# Altium PCB Copy of powersuppy.PcbDoc
Units mm, origin at the board's own origin, x right, y up, seen from the top; angles counter-clockwise.
Board outline 153.8 x 127.13 mm, 2 copper layers (Top Layer, Bottom Layer); 118 components, 95 nets, 382 pads, 107 vias.
Unrouted connection lines stored in the file: 211.
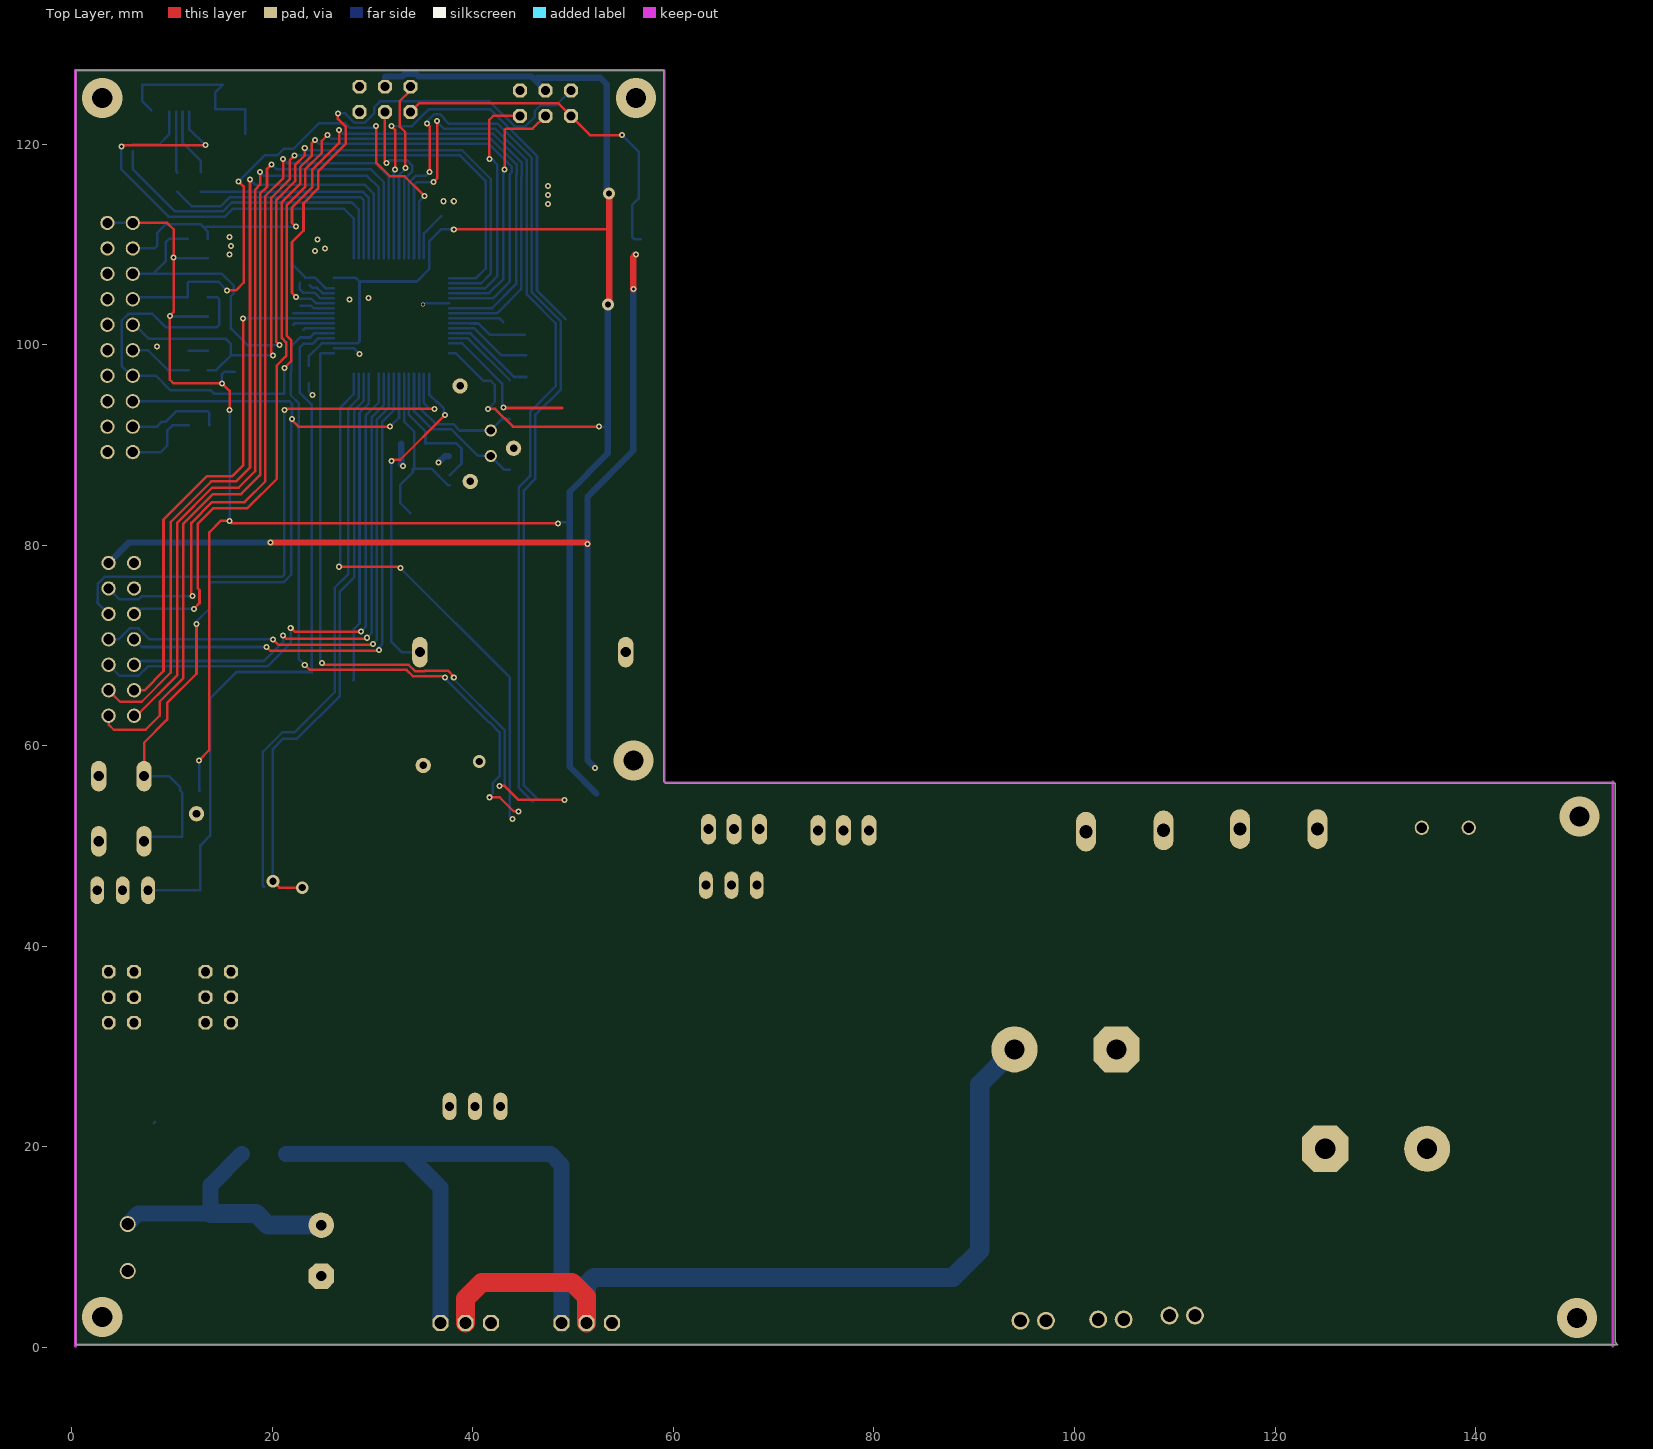
[diagram p0: Top Layer view]
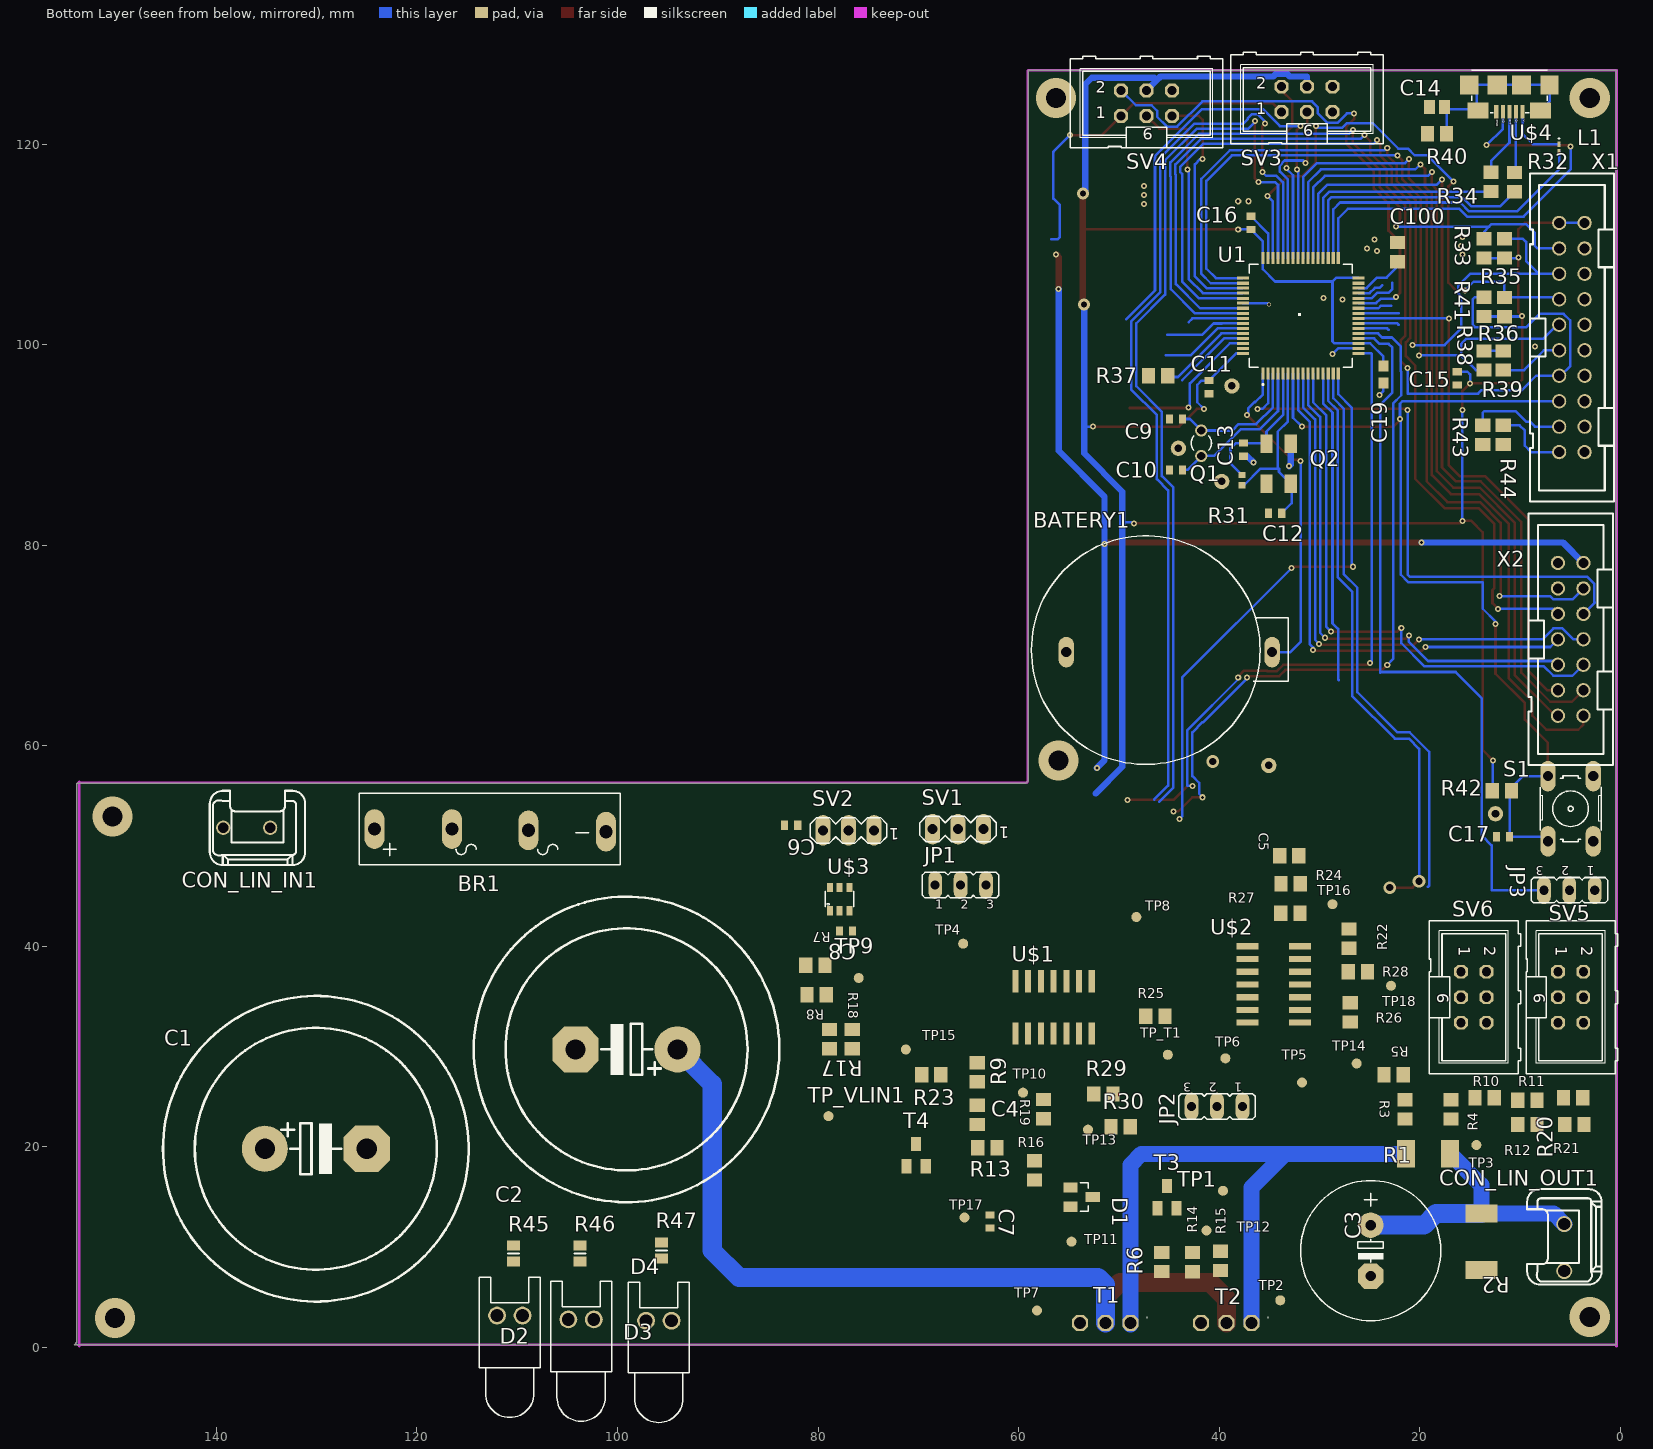
[diagram p1: Bottom Layer view, seen from below]

## Layer stack, top to bottom
Top Solder: solder mask 0.0102, Solder Resist, Dk 3.5
Top Layer: signal copper 0.0356
Dielectric 1: dielectric 0.32, FR-4, Dk 4.8
Bottom Layer: signal copper 0.0356
Bottom Solder: solder mask 0.0102, Solder Resist, Dk 3.5

## Board outline
0.381,127.382 0.411,127.352 59.056,127.352 59.056,56.475 59.27,56.261 153.924,56.261 153.924,0.508 154.178,0.254 0.381,0.254

## Design rules (kind name [scope] priority, off if disabled: settings)
Clearance [All] p1: gap=0.152 ignorepadtopadclearanceinfootprint=FALSE
ComponentClearance [All] p1 off: gap=0.254 collisioncheckmode=3 verticalgap=0.254 showdistances=FALSE
PolygonConnect [All] p1: connectstyle=Relief reliefconductorwidth=0.254 reliefentries=4 polygonreliefangle="90 Angle" airgapwidth=0.254
RoutingVias [All] p1: holewidth=0.3 width=0.6 viastyle="Through Hole" minholewidth=0.3 minwidth=0.6 maxholewidth=0.711 maxwidth=1.27
SolderMaskExpansion [All] p1: expansion=0.102
Width [All] p1: maxlimit=2.54 minlimit=0.254 preferedwidth=0.254
29 further rules are at their usual default settings.

## Classes and differential pairs
component class powersupply_grid8_0: BR1 C1 C2 C3 C4 C5 C6 C7 C8 CON_LIN_IN1 CON_LIN_OUT1 D1 D4 JP1 JP2 JP3 R1 R2 R3 R4 R5 R6 R7 R8 R9 R10 R11 R12 R13 R14 R15 R16 R17 R18 R19 R20 R21 R22 R23 R24 R25 R26 R27 R28 R29 R30 R47 SV1 SV2 T1 T2 T3 T4 TP1 TP2 TP3 TP4 TP5 TP6 TP7 TP8 TP9 TP10 TP11 TP12 TP13 TP14 TP15 TP16 TP17 TP18 TP_T1 TP_VLIN1 U$1 U$2 U$3
component class powersupply_grid8_1: BATERY1 C9 C10 C11 C12 C13 C14 C15 C16 C17 C19 C23 C100 D2 D3 L1 Q1 Q2 R31 R32 R33 R34 R35 R36 R37 R38 R39 R40 R41 R42 R43 R44 R45 R46 S1 SV3 SV4 SV5 SV6 U1 U$4 U$5 U$6 X1 X2

## Components (designator, comment, footprint, x,y, rotation, side; value= is the part's Value field where it differs from the comment)
BATERY1 "101" KEYSTONE101 55.245,69.342 r270 bottom
BR1 "4GBJ406" FB100 110.236,51.689 r180 bottom
C1 "15000u" EB30D 130.087,19.812 r180 bottom
C2 "15000u" EB30D 99.098,29.718 r0 bottom
C3 "470U" E5-13 24.892,9.652 r270 bottom
C4 "10n" C0805#1 64.135,23.173 r90 bottom
C5 "10n" C0805#1 33.02,49.022 r180 bottom
C6 "100n" C0402 82.677,52.07 r0 bottom
C7 "100n" C0402 62.865,12.573 r270 bottom
C8 "100n" C0402 77.216,41.529 r0 bottom
C9 "10p" C0402 44.323,92.583 r180 bottom
C10 "10p" C0402 44.323,87.503 r180 bottom
C11 "100n" C0402 41.021,95.758 r270 bottom
C12 "20p" C0402 34.417,83.185 r0 bottom
C13 "20p" C0402 37.592,89.535 r270 bottom
C14 "4.7n" C0805#2 18.288,123.698 r0 bottom
C15 "100n" C0402 16.256,96.647 r270 bottom
C16 "100n" C0402 36.83,112.141 r90 bottom
C17 "100n" C0402 11.684,50.927 r0 bottom
C19 "100n" C0603 23.622,97.028 r270 bottom
C100 "4.7u" C0805#1 22.225,109.22 r90 bottom
CON_LIN_IN1 "POWERCON" MKS1852-6-0-202#1 135.89,51.816 r0 bottom
CON_LIN_OUT1 "POWERCON" MKS1852-6-0-202#2 5.588,11.049 r270 bottom
D1 "BA70-06" SOT23 53.721,14.986 r270 bottom
D2 "LED0" LED-0 110.744,3.175 r180 bottom
D3 "LED0" LED-0 103.632,2.794 r180 bottom
D4 "LED0" LED-0 95.885,2.667 r180 bottom
JP1 "JP2E" JP2 65.786,46.101 r180 bottom
JP2 "JP2E" JP2 40.222,24.036 r0 bottom
JP3 "JP2E" JP2 5.08,45.593 r0 bottom
L1 "WE-CBF_0603" 0603 6.096,119.634 r270 bottom
Q1 "32k" TC26V 41.783,90.17 r90 bottom
Q2 "ABM3B" ABM3B 32.258,85.217 r90 bottom
R1 "0.33" R2010 19.177,19.304 r180 bottom
R2 "4.7K" R2512 13.843,10.541 r90 bottom
R3 "100k" R0805 21.463,23.749 r270 bottom
R4 "100k" R0805 16.891,23.749 r270 bottom
R5 "330K" R0805 22.606,27.178 r0 bottom
R6 "10k" R0805 45.72,8.509 r90 bottom
R7 "20k" R0805 80.264,38.1 r0 bottom
R8 "20k" R0805 80.137,35.179 r0 bottom
R9 "1M" R0805 64.135,27.432 r90 bottom
R10 "330K" R0805 13.53,24.892 r180 bottom
R11 "20k" R0805 9.271,24.638 r180 bottom
R12 "20k" R0805 9.271,22.225 r180 bottom
R13 "100" R0805 63.119,19.904 r180 bottom
R14 "1k" R0805 42.672,8.509 r270 bottom
R15 "1.2k" R0805 39.878,8.636 r270 bottom
R16 "1k" R0805 58.42,17.653 r270 bottom
R17 "2.2k" R0805 78.867,30.734 r90 bottom
R18 "2.2k" R0805 76.588,30.734 r90 bottom
R19 "100" R0805 57.531,23.749 r90 bottom
R20 "2.2k" R0805 4.699,24.892 r0 bottom
R21 "2.2k" R0805 4.572,22.225 r0 bottom
R22 "1M" R0805 27.051,40.767 r90 bottom
R23 "100" R0805 68.707,27.178 r0 bottom
R24 "100" R0805 32.893,46.228 r180 bottom
R25 "10" R0805 46.361,33.02 r0 bottom
R26 "1k" R0805 26.924,33.401 r90 bottom
R27 "1k" R0805 32.893,43.307 r0 bottom
R28 "1k" R0805 26.162,37.465 r0 bottom
R29 "1k" R0805 51.562,25.273 r180 bottom
R30 "1k" R0805 49.842,22.004 r180 bottom
R31 "1M" R0402 37.719,86.487 r270 bottom
R32 "10" R0805 10.541,116.205 r270 bottom
R33 "10k" R0805 13.589,109.601 r270 bottom
R34 "10" R0805 12.89,116.23 r270 bottom
R35 "10k" R0805 11.557,109.601 r270 bottom
R36 "10k" R0805 11.557,103.759 r270 bottom
R37 "10k" R0805 46.101,96.901 r180 bottom
R38 "10k" R0805 13.589,98.425 r270 bottom
R39 "10k" R0805 11.684,98.425 r270 bottom
R40 "1M" R0805 18.288,121.031 r180 bottom
R41 "10k" R0805 13.589,103.759 r90 bottom
R42 "10k" R0805 11.811,55.499 r180 bottom
R43 "10k" R0805 13.716,90.993 r90 bottom
R44 "10k" R0805 11.684,90.993 r90 bottom
R45 "Res2" 6-0805_L 110.363,9.345 r270 bottom value=100
R46 "Res2" 6-0805_L 103.759,9.345 r270 bottom value=100
R47 "Res2" 6-0805_L 95.631,9.652 r270 bottom value=100
S1 "10-XX" B3F-10XX 4.953,53.721 r270 bottom
SV1 "MA03-1" MA03-1 66.04,51.689 r0 bottom
SV2 "MA03-1" MA03-1 76.962,51.562 r0 bottom
SV3 "ML6" ML6 31.242,124.46 r180 bottom
SV4 "ML6" ML6 47.244,124.079 r180 bottom
SV5 "ML6" ML6 4.953,34.925 r270 bottom
SV6 "ML6" ML6 14.605,34.925 r270 bottom
T1 "IRL640PBF" TO-220AB 53.848,2.413 r180 bottom
T2 "IRL640PBF" TO-220AB 41.783,2.413 r180 bottom
T3 "BC856" SOT23-BEC 45.212,14.986 r180 bottom
T4 "NPN BC847" SOT23-BEC 70.231,19.177 r180 bottom
TP1 "TPB2,54" B2,54 39.624,15.621 r90 bottom
TP2 "TPB2,54" B2,54 33.909,4.699 r90 bottom
TP3 "TPB2,54" B2,54 14.351,20.193 r90 bottom
TP4 "TPB2,54" B2,54 65.532,40.259 r90 bottom
TP5 "TPB2,54" B2,54 31.75,26.416 r90 bottom
TP6 "TPB2,54" B2,54 39.383,28.829 r270 bottom
TP7 "TPB2,54" B2,54 58.166,3.683 r90 bottom
TP8 "TPB2,54" B2,54 48.26,42.926 r90 bottom
TP9 "TPB2,54" B2,54 75.946,36.83 r90 bottom
TP10 "TPB2,54" B2,54 59.563,25.4 r90 bottom
TP11 "TPB2,54" B2,54 54.737,10.541 r90 bottom
TP12 "TPB2,54" B2,54 41.275,11.651 r90 bottom
TP13 "TPB2,54" B2,54 53.086,21.717 r90 bottom
TP14 "TPB2,54" B2,54 26.289,28.321 r90 bottom
TP15 "TPB2,54" B2,54 71.247,29.718 r90 bottom
TP16 "TPB2,54" B2,54 28.702,44.196 r90 bottom
TP17 "TPB2,54" B2,54 65.405,12.954 r90 bottom
TP18 "TPB2,54" B2,54 22.86,36.068 r90 bottom
TP_T1 "TPB2,54" B2,54 45.124,29.186 r270 bottom
TP_VLIN1 "TPB2,54" B2,54 78.968,23.064 r270 bottom
U1 "STM32F7X2RXT" LQFP64-10X10MM 31.877,102.87 r90 bottom
U$1 "LM324" SO14 56.515,33.909 r0 bottom
U$2 "LM324" SO14 34.544,36.195 r90 bottom
U$3 "MAX6070" SOT23-6 77.851,44.704 r180 bottom
U$4 "USB_MICROB" USB_MICROB_PACKAGE 11.049,122.555 r0 bottom
X1 "2520-" PAK100/2500-20 4.826,100.711 r270 bottom
X2 "2514-" PAK100/2500-14 4.953,70.612 r270 bottom

## Footprints (in the part's own frame and the unit in brackets; to place one, negate y for a bottom-side part, rotate by r counter-clockwise, add the part's x,y. Pads: shape width x height; smd on the part's side, far side on the other; paste and mask are expansions set on the pad)
6-0805_L [mm] "Chip Resistor, Body 2.0x1.2mm, IPC High Density"
  rect 1x1.3 smd: 1(-0.8,0) 2(0.8,0)
  silkscreen extent 0,-0.55 0,0.55, body extent -1.07,-0.7 1.07,0.7, height 0.7
0603 [mm] "Chip Inductor, Body 0.6x0.3mm, IPC High Density"
  rect 0.5x0.3 smd: 1(-0.35,0) 2(0.35,0)
  silkscreen extent -0.9,-0.05 -0.9,0.05, body extent -0.33,-0.18 0.33,0.18, height 0.55
ABM3B [mil]
  rect 71x48 smd: P$1(36,24) P$2(193,24) P$3(193,119) P$4(36,119)
B2,54 [mm]
  rrect100% 1x1 smd: TP(0,0)
B3F-10XX [mil]
  oval 120x60 hole 40: 1(-128,89) 2(128,89) 3(-128,-89) 4(128,-89)
  silkscreen extent -130,-120 130,120
C0402 [mil]
  rect 28x36 smd: 1(-25.59,0) 2(26,0)
C0603 [mil]
  rect 44x40 smd: 1(-33.46,0) 2(34,0)
C0805#1 [mil]
  rect 52x60 smd: 1(-37.4,0) 2(38,0)
C0805#2 [mil] "Chip Capacitor, Body 2.0x1.3mm, IPC High Density"
  rect 43.31x55.12 smd: 1(-29.53,0) 2(29.53,0)
  body extent -43,-29 43,29, height 55
E5-13 [mil]
  round 100 hole 40: +(-100,0)
  oct 100x100 hole 40: -(100,0)
  silkscreen extent -275,-275 275,275
EB30D [mil]
  round 181 hole 79: +(-200,0)
  oct 181x181 hole 79: -(200,0)
  silkscreen extent -600,-600 600,600
FB100 [mil]
  oval 78x156 hole 52: +(-551.18,0) -(358,-10) AC1(-247.18,0) AC2(53,-5)
  silkscreen extent -611,-140 414,140
JP2 [mil]
  oval 54x108 hole 36: 1(-100,0) 2(0,0) 3(100,0)
  silkscreen extent -150,-50 150,50
KEYSTONE101 [mil]
  oval 120x60 hole 40: P$1(0,0) P$2(0,808)
  silkscreen extent -457,-137 441,871
LED-0 [mil] "LED; 2 Leads"
  round 70 hole 50: 1(50,0) 2(-50,0)
  silkscreen extent -120,-400 120,150
LQFP64-10X10MM [mil]
  rect 47x12 smd: 1(-226.38,148) 2(-226.38,128) 3(-226.38,109) 4(-226.38,89) 5(-226.38,69) 6(-226.38,50) 7(-226.38,30) 8(-226.38,10) 9(-226.38,-9.84) 10(-226.38,-29.53) 11(-226.38,-49.21) 12(-226.38,-68.9) 13(-226.38,-88.58) 14(-226.38,-108.27) 15(-226.38,-127.95) 16(-226.38,-147.64) 33(227,-147.64) 34(227,-127.95) 35(227,-108.27) 36(227,-88.58) 37(227,-68.9) 38(227,-49.21) 39(227,-29.53) 40(227,-9.84) 41(227,10) 42(227,30) 43(227,50) 44(227,69) 45(227,89) 46(227,109) 47(227,128) 48(227,148)
  rect 12x47 smd: 17(-147.64,-226.38) 18(-127.95,-226.38) 19(-108.27,-226.38) 20(-88.58,-226.38) 21(-68.9,-226.38) 22(-49.21,-226.38) 23(-29.53,-226.38) 24(-9.84,-226.38) 25(10,-226.38) 26(30,-226.38) 27(50,-226.38) 28(69,-226.38) 29(89,-226.38) 30(109,-226.38) 31(128,-226.38) 32(148,-226.38) 49(148,227) 50(128,227) 51(109,227) 52(89,227) 53(69,227) 54(50,227) 55(30,227) 56(10,227) 57(-9.84,227) 58(-29.53,227) 59(-49.21,227) 60(-68.9,227) 61(-88.58,227) 62(-108.27,227) 63(-127.95,227) 64(-147.64,227)
  silkscreen extent -273,-202 202,202
MA03-1 [mil]
  oval 60x120 hole 40: 1(-100,0) 2(0,0) 3(100,0)
  silkscreen extent -150,-50 150,50
MKS1852-6-0-202#1 [mil]
  round 56 hole 40: 1(-49.21,0) 2(135,0)
  silkscreen extent -186,-145 188,146
MKS1852-6-0-202#2 [mil]
  round 62.99 hole 47.24: 1(-49.21,0) 2(135,0)
  silkscreen extent -186,-145 188,146
ML6 [mil]
  oct 54x54 hole 36: 1(-100,-50) 2(-100,50) 3(0,-50) 4(0,50) 5(100,-50) 6(100,50)
  silkscreen extent -300,-175 300,185
PAK100/2500-14 [mil]
  round 56 hole 40: 1(-300,-50) 2(-300,50) 3(-200,-50) 4(-200,50) 5(-100,-50) 6(-100,50) 7(0,-50) 8(0,50) 9(100,-50) 10(100,50) 11(200,-50) 12(200,50) 13(300,-50) 14(300,50)
  silkscreen extent -494,-165 494,166
PAK100/2500-20 [mil]
  round 56 hole 40: 1(-450,-50) 2(-450,50) 3(-350,-50) 4(-350,50) 5(-250,-50) 6(-250,50) 7(-150,-50) 8(-150,50) 9(-50,-50) 10(-50,50) 11(50,-50) 12(50,50) 13(150,-50) 14(150,50) 15(250,-50) 16(250,50) 17(350,-50) 18(350,50) 19(450,-50) 20(450,50)
  silkscreen extent -644,-165 644,166
R0402 [mil]
  rect 24x28 smd: 1(-19.69,0) 2(20,0)
R0805 [mil]
  rect 52x60 smd: 1(-37.4,0) 2(38,0)
R2010 [mil]
  rect 71x107 smd: 1(-86.61,0) 2(87,0)
R2512 [mil]
  rect 71x126 smd: 1(-110.24,0) 2(111,0)
SO14 [mil]
  rect 24x87 smd: 1(-150,-102.36) 2(-100,-102.36) 3(-50,-102.36) 4(0,-102.36) 5(50,-102.36) 6(100,-102.36) 7(150,-102.36) 8(150,103) 9(100,103) 10(50,103) 11(0,103) 12(-50,103) 13(-100,103) 14(-150,103)
SOT23 [mil]
  rect 40x56 smd: 1(-37.4,-43.31) 2(38,-43.31) 3(0,44)
  silkscreen extent -56,-6 56,26
SOT23-6 [mil]
  rect 24x36 smd: 1(-37.4,-45.28) 2(0,-45.28) 3(38,-45.28) 4(38,46) 5(0,46) 6(-37.4,46)
  silkscreen extent -56,-31 56,31
SOT23-BEC [mil]
  rect 40x56 smd: B(-37.4,-43.31) C(0,44) E(38,-43.31)
TC26V [mil]
  round 48 hole 32: 1(-50,0) 2(50,0)
  silkscreen extent -28,-40 29,40
TO-220AB [mm]
  oct 1.6x1.6 hole 1.2: P$1(-0.03,0.025) P$2(2.515,0.025) P$3(5.004,0.025)
  silkscreen extent 6.65,0.48 6.65,0.63
USB_MICROB_PACKAGE [mil]
  rect 16x54 smd: D+(0,-26.77) D-(-25.2,-26.77) GND(52,-26.77) ID(26,-26.77) V(-51.18,-26.77)
  rect 83x63 smd: PAD1(-122.05,-31.5) PAD2(123,-31.5)
  rect 71x75 smd: PAD3(-157.48,-131.89) PAD6(158,-131.89)
  rect 75x75 smd: PAD4(-47.24,-131.89) PAD5(48,-131.89)
  silkscreen extent -148,-189 148,-22

## Part data
C1 C2: library part CPOL-EUE10-30, "<B>POLARIZED CAPACITOR</B>, European symbol", +=+
C3: library part CPOL-EUE5-13, "<B>POLARIZED CAPACITOR</B>, European symbol", +=+
C4 C5 C14: library part C-EUC0805, "<B>CAPACITOR</B>, European symbol", SPICEPREFIX=C
C6 C7 C8 C9 C10 C11 C12 C13 C15 C16 C17: library part C-EUC0402, "<B>CAPACITOR</B>, European symbol", SPICEPREFIX=C
C19: library part C-EUC0603, "<B>CAPACITOR</B>, European symbol", SPICEPREFIX=C
C100: library part C-EUC0805, SPICEPREFIX=C
D1: library part BAS40-06
D2 D3 D4: "Typical INFRARED GaAs LED", LatestRevisionDate=08-Jul-2005, LatestRevisionNote="Mech Layer 1 removed.", PackageDescription="LED; 2 Leads", PackageReference=LED-0, Published=8-Jun-2000, Publisher="Altium Limited"
JP1 JP2 JP3: "<b>JUMPER</b>"
L1: "<b> SMD EMI Suppression Ferrite Beads WE-CBF</b> <p> /  / - Excellent anti-EMI properties <br> / - Low DC-restistance <br> / - Impedances till 3000 ohms <br> / - Rated current up to 6 A<p> /  / -- Reliable Ni-Sn electrodes<br> / -- Perfect as data lined filter and for uncoupling of distribution voltage<br>", MPN=742792695, PACKAGE=IND-0603, OC_FARNELL=1635699, OC_NEWARK=08P2449, SUPPLIER="Wuerth Elektronik"
Q1: library part CRYSTALTC26V, "<b>CRYSTAL</b>", 1=1, 2=2, OC_FARNELL=unknown, OC_NEWARK=unknown
R1: library part R-EU_R2010, "<B>RESISTOR</B>, European symbol"
R2: library part R-EU_R2512, "<B>RESISTOR</B>, European symbol"
R3 R4 R5 R6 R7 R8 R9 R10 R11 R12 R13 R14 R15 R16 R17 R18 R19 R20 R21 R22 R23 R24 R25 R26 R27 R28 R29 R30 R32 R33 R34 R35 R36 R37 R38 R39 R40 R41 R42 R43 R44: library part R-EU_R0805, "<B>RESISTOR</B>, European symbol"
R31: library part R-EU_R0402, "<B>RESISTOR</B>, European symbol"
R45 R46 R47: "Resistor", LatestRevisionDate=17-Jul-2002, LatestRevisionNote="Re-released for DXP Platform.", PackageDescription="Axial Device, Thru-Hole; 2 Leads; 0.4 in Pin Spacing", PackageReference=AXIAL-0.4, Published=8-Jun-2000, Publisher="Altium Limited"
S1: "<b>OMRON SWITCH</b>", MPN=B3F-1000, OC_FARNELL=176432, OC_NEWARK=36M3542
SV1 SV2: "<b>PIN HEADER</b>", OC_FARNELL=unknown, OC_NEWARK=unknown
SV3 SV4 SV5 SV6: "<b>HARTING</b>", OC_FARNELL=unknown, OC_NEWARK=unknown
T3: library part *-PNP-SOT23-BEC, "PNP Transistror"
T4: library part *-NPN-SOT23-BEC
TP1 TP2 TP3 TP4 TP5 TP6 TP7 TP8 TP9 TP10 TP11 TP12 TP13 TP14 TP15 TP16 TP17 TP18 TP_T1 TP_VLIN1: "<b>Test pad</b>"
U1: MANUFACTURER_PART_NUMBER=stm32f7x2rxt, VENDOR=STMicroelectronics
U$4: "This is the hirose ZX62-B-5PA(11) MICRO-USB B Type female connection.", USB=USB
X1 X2: "<b>3M (TM) Pak 100 4-Wall Header</b><p> / Source: 3M", OC_FARNELL=unknown, OC_NEWARK=unknown
U$1 U$2: V+=V+, V-=V-

## Free pads (board coordinates)
  round 1.524 hole 0.762: 2(35.052,58.039) 3(12.446,53.213) 4(38.735,95.885) 5(39.751,86.36) 6(44.069,89.662)

## Via types
v1: diameter 0.6, hole 0.3, Top Layer to Bottom Layer, 95 vias
v2: diameter 4, hole 2, Top Layer to Bottom Layer, 6 vias
v3: diameter 1.27, hole 0.711, Top Layer to Bottom Layer, 3 vias
v4: diameter 1.2, hole 0.6, Top Layer to Bottom Layer, 2 vias
v5: diameter 0.4, hole 0.3, Top Layer to Bottom Layer, 1 vias

## Nets (pads, with @x,y where several pads share a name; then routed paths per layer and width w, separated by ;. In a path a pad name is that pad's centre, name@x,y a point inside that pad or via, vN(x,y) a via of type N, cw(c..) or ccw(c..) an arc to the next point about the centre after c; other vN are vias at no path point)
+3V3: C11.1 C15.1 C16.1 C19.1 R33.2 R35.2 R36.2 R41.1 R42.1 SV3.4 SV4.4 SV5.1 SV6.1 U1.13 U1.19 U1.32 U1.48 U1.64 X1.1 X1.2 | length 309
  Top Layer w0.254: X1.1 9.525,112.141 10.16,111.506 v1(10.16,108.712) 10.16,103.251 v1(9.779,102.87) 9.779,96.52 10.16,96.139 v1(14.986,96.139) 15.748,95.377 v1(15.748,93.472) ; v1(12.7,58.547) 13.716,59.563 13.716,81.28 14.859,82.423 v1(15.748,82.423) 16.002,82.169 v1(48.514,82.169) ; v1(38.1,111.506) 53.594,111.506 ; v1(41.529,93.599) 42.217,93.599 43.995,91.821 v1(52.578,91.821)
  Top Layer w0.635: v4(53.467,104.013) 53.594,104.14 53.594,111.506 v4(53.594,115.062)
  Bottom Layer w0.254: X1.2 X1.1 ; v1(9.779,102.87) 9.84,102.809 R41.1 ; v1(10.16,108.712) 10.236,108.636 R35.2 R33.2 ; v1(12.7,58.547) 12.7,55.56 R42.1 ; v1(14.986,96.139) 14.986,97.028 15.255,97.297 C15.1 ; v1(15.748,82.423) v1(15.748,93.472) ; C19.1 23.622,98.806 24.936,100.12 U1.19 28.492,100.12 28.702,100.33 28.702,106.299 ; U1.32@26.127,106.655 28.346,106.655 28.702,106.299 ; 28.067,66.548 28.148,66.629 28.148,71.656 28.702,72.21 28.702,93.218 29.627,94.143 U1.13 ; U1.64 38.309,99.12 C11.1 41.768,96.408 42.186,95.99 42.186,94.256 v1(41.529,93.599) ; v1(38.1,111.506) 38.085,111.491 C16.1 35.636,110.297 U1.48 35.636,107.518 34.417,106.299 28.702,106.299 ; v1(48.514,82.169) 48.641,82.296 49.657,82.296 ; v1(52.578,91.821) 53.467,91.821
  Bottom Layer w0.635: SV3.4 31.242,126.746 32.961,126.746 33.202,126.987 34.362,126.987 34.603,126.746 45.847,126.746 46.228,126.365 ; SV4.4 46.228,126.365 ; 52.324,55.245 49.657,57.912 49.657,82.296 49.657,85.344 53.467,89.154 53.467,91.821 v4(53.467,104.013) ; v4(53.594,115.062) 53.34,115.316 53.34,125.959 52.692,126.606 46.469,126.606 46.228,126.365
+5V: C8.1 SV3.1 SV4.1 U$3.3 U$3.6 X2.2 | length 137.1
  Top Layer w0.254: SV3.1 34.671,124.079 48.514,124.079 SV4.1 51.689,120.904 v1(54.864,120.904)
  Top Layer w0.635: v1(19.812,80.264) 51.308,80.264 v1(51.435,80.137) ; v1(56.007,105.537) 56.007,108.712 v1(56.261,108.966) v1@56.134,108.966
  Bottom Layer w0.254: v1(54.864,120.904) 56.515,119.253 56.53,119.253 56.53,116.84 56.53,114.569 55.88,113.919 55.88,110.744 56.134,110.49 56.728,110.49
  Bottom Layer w0.635: X2.2 5.715,80.264 v1(19.812,80.264) ; v1(52.197,57.785) 51.435,58.547 v1(51.435,80.137) 51.435,84.836 56.007,89.408 v1(56.007,105.537)
AGND: C1.- C2.- C3.- C6.2 C7.2 C8.2 CON_LIN_OUT1.2 D4.2 R2.1 R5.2 R17.1 R18.1 R20.1 R21.1 R30.2 SV1.3 SV2.3 T3.C T4.E U1.12 U1.18 U$1.11 U$2.11 U$3.2 | length 2.8
  Bottom Layer w0.254: U1.18 28.142,99.62 v1(28.702,99.06)
DGND: BATERY1.P$1 C11.2 C12.2 C13.2 C14.2 C15.2 C16.2 C17.2 C19.2 C100.2 D2.2 D3.2 pad.2 pad.3 pad.4 pad.5 pad.6 Q2.P$2 Q2.P$4 R37.1 R38.1 R39.1 R40.1 R43.1 R44.1 S1.1 S1.2 SV3.5 SV3.6 SV4.6 SV5.5 SV6.5 U1.31 U1.47 U1.63 U$4.GND X1.4 X1.6 X1.8 X1.10 X1.12 X1.14 X1.16 X1.18 X1.20 X2.1 X2.3 | length 11.7
  Bottom Layer w0.254: R39.1 R38.1 ; C19.2 23.622,95.377 v1(24.003,94.996) ; U1.47 35.128,111.1 C16.2
  Bottom Layer w0.635: Q2.P$2 32.868,88.036 v1(33.02,87.884) ; v1(36.576,88.265) 37.186,88.875 C13.2
  other v1: 8.509,99.822 27.686,104.521 29.591,104.648 15.748,108.966 24.257,109.347 25.273,109.601 15.875,109.855 24.511,110.49 15.748,110.744 47.498,114.046 37.084,114.3 38.1,114.3 47.498,114.935 47.498,115.824
  other v2: 150.114,2.921 3.048,3.048 150.368,52.959 56.007,58.547 3.048,124.587 56.261,124.587
  other v3: 40.64,58.42
FEEDBACK_LIN: C4.2 R9.1 R11.1 R12.1 R20.2 R21.2 TP10.TP U$1.5 U$1.9
GND: BR1.- C9.1 C10.1
IDAC: JP3.3 U$1.12 | length 69.8
  Top Layer w0.254: v1(23.241,68.072) 23.749,67.564 33.403,67.564 34.038,66.929 37.119,66.929 v1(37.246,66.802) ; v1(41.656,54.864) 42.672,54.864 44.069,53.467 v1(44.577,53.467)
  Bottom Layer w0.254: v1(23.241,68.072) 22.652,68.661 22.652,94.144 21.844,94.952 21.844,97.289 21.89,97.335 21.89,99.822 22.779,100.711 23.749,100.711 24.158,101.12 26.127,101.12 ; v1(37.246,66.802) 37.246,66.693 41.582,62.357 41.656,62.357 42.672,61.341 42.672,56.97 41.991,56.289 41.991,55.199 v1(41.656,54.864)
IMEAS: U1.15 U$2.13 U$2.14 | length 55.9
  Bottom Layer w0.254: 19.177,45.934 19.05,46.061 19.05,59.392 20.999,61.341 22.216,61.341 26.23,65.355 26.23,75.76 27.559,77.089 27.559,93.599 28.627,94.667 U1.15
IPOT: JP3.1 SV2.2
JNTRST: R33.1 U1.56 X1.3 | length 71.7
  Top Layer w0.254: v1(22.352,111.76) 21.971,112.141 21.971,113.665 23.984,115.678 23.984,117.41 26.67,120.096 v1(26.67,121.412)
  Bottom Layer w0.254: X1.3 8.255,109.601 8.509,109.855 8.509,111.125 9.398,112.014 12.827,112.014 13.081,111.76 ; R33.1 13.589,111.252 13.081,111.76 ; v1(22.352,111.76) 13.081,111.76 ; v1(26.67,121.412) 27.051,121.031 42.024,121.031 44.877,118.178 44.877,116.772 44.831,116.726 44.831,105.537 42.418,103.124 U1.56
JTCLK: R38.2 U1.49 X1.9 | length 72.7
  Top Layer w0.254: v1(20.066,98.933) 19.897,99.102 19.897,114.639 21.763,116.505 21.763,118.41 v1(22.225,118.872)
  Bottom Layer w0.254: X1.9 6.333,101.981 7.73,100.584 15.367,100.584 15.875,100.076 15.875,98.933 ; R38.2 14.402,97.46 15.875,98.933 ; v1(20.066,98.933) 15.875,98.933 ; v1(22.225,118.872) 38.735,118.872 41.275,116.332 41.275,107.569 40.335,106.629 U1.49
JTDI: R35.1 U1.50 X1.5 | length 81.3
  Top Layer w0.254: v1(20.701,99.949) 20.405,100.245 20.405,114.429 22.271,116.295 22.271,117.902 23.241,118.872 v1(23.241,119.634)
  Bottom Layer w0.254: X1.5 8.128,107.061 ; R35.1 9.713,110.551 9.398,110.236 9.398,108.331 8.128,107.061 ; v1(20.701,99.949) 17.526,99.949 15.875,101.6 15.875,104.828 16.175,105.128 16.175,105.872 14.986,107.061 8.128,107.061 ; v1(23.241,119.634) 23.495,119.38 38.945,119.38 41.783,116.542 41.783,107.061 40.843,106.121 U1.50
JTDO: R41.2 U1.55 X1.13 | length 103.9
  Top Layer w0.254: v1(21.209,97.663) 21.89,98.344 21.89,100.441 21.463,100.868 21.463,113.919 23.287,115.743 23.287,117.475 24.938,119.126 24.938,120.315 v1(25.527,120.904)
  Bottom Layer w0.254: R41.2 14.529,104.724 14.732,104.521 14.732,101.991 14.494,101.752 9.367,101.752 8.046,103.073 5.644,103.073 5.004,102.433 5.004,97.841 5.944,96.901 X1.13 8.382,96.901 9.823,95.46 13.843,95.46 14.18,95.123 21.209,95.123 v1(21.209,97.663) ; v1(25.527,120.904) 25.908,120.523 41.813,120.523 44.369,117.967 44.369,116.983 44.323,116.937 44.323,106.045 41.91,103.632 U1.55
JTMS: R36.1 U1.46 X1.7 | length 56.3
  Top Layer w0.254: v1(15.494,105.41) 16.383,105.41 17.145,106.172 17.145,115.771 v1(16.637,116.279) ; v1(30.353,121.793) 30.353,118.163 31.722,116.794 33.193,116.794 v1(35.179,114.808)
  Bottom Layer w0.254: X1.7 6.284,104.709 R36.1 11.557,106.172 11.659,106.274 14.63,106.274 v1(15.494,105.41) ; v1(16.637,116.279) 19.23,118.872 20.5,118.872 21.181,119.553 22.144,119.553 24.684,122.093 27.259,122.093 27.737,121.615 30.175,121.615 v1(30.353,121.793) ; U1.46 34.646,114.275 v1(35.179,114.808)
LCD_D0: U1.8 X2.7 | length 53.1
  Top Layer w0.254: v1(19.431,69.85) 19.796,69.485 30.563,69.485 v1(30.641,69.562)
  Bottom Layer w0.254: X2.7 6.985,69.85 v1(19.431,69.85) ; v1(30.641,69.562) 30.641,69.807 30.95,70.116 30.95,92.291 32.131,93.472 U1.8
LCD_D1: U1.9 X2.8 | length 55.1
  Top Layer w0.254: v1(20.066,70.612) 20.589,70.089 29.96,70.089 v1(30.037,70.166)
  Bottom Layer w0.254: X2.8 4.678,70.612 5.771,71.704 6.675,71.704 7.768,70.612 v1(20.066,70.612) ; v1(30.037,70.166) 30.442,70.572 30.442,92.545 31.627,93.73 U1.9
LCD_D2: U1.10 X2.9 | length 52
  Top Layer w0.254: v1(21.082,70.993) 21.382,70.693 29.356,70.693 v1(29.433,70.77)
  Bottom Layer w0.254: X2.9 6.604,68.453 19.177,68.453 21.082,70.358 v1(21.082,70.993) ; v1(29.433,70.77) 29.934,71.271 29.934,92.799 31.127,93.992 U1.10
LCD_D3: U1.11 X2.10 | length 55.1
  Top Layer w0.254: v1(21.844,71.755) 22.225,71.374 v1(28.829,71.374)
  Bottom Layer w0.254: X2.10 4.775,66.98 6.675,66.98 7.641,67.945 19.558,67.945 21.844,70.231 v1(21.844,71.755) ; v1(28.829,71.374) 29.337,71.882 29.337,92.964 30.627,94.254 U1.11
LCD_D4: U1.24 X2.11 | length 52.8
  Top Layer w0.254: X2.11 7.239,65.532 9.153,67.446 9.153,82.559 13.462,86.868 16.002,86.868 17.099,87.965 v1(17.099,102.62)
  Bottom Layer w0.254: v1(17.099,102.62) 17.145,102.574 v1@17.145,102.489 ; v1@17.188,102.532 17.276,102.62 U1.24
LCD_D5: U1.37 X2.12 | length 81.1
  Top Layer w0.254: X2.12 4.826,64.389 6.985,64.389 9.879,67.283 9.879,82.322 13.917,86.36 16.383,86.36 17.78,87.757 v1(17.78,116.459)
  Bottom Layer w0.254: v1(17.78,116.459) 18.288,115.951 29.21,115.951 30.127,115.034 U1.37
LCD_D6: U1.38 X2.13 | length 80.6
  Top Layer w0.254: X2.13 6.477,62.992 10.508,67.023 10.508,82.232 14.007,85.731 16.643,85.731 18.288,87.376 18.288,115.443 18.796,115.951 v1(18.796,117.221)
  Bottom Layer w0.254: v1(18.796,117.221) 19.177,116.84 29.464,116.84 30.627,115.677 U1.38
LCD_D7: U1.39 X2.14 | length 87.5
  Top Layer w0.254: X2.14 3.683,62.103 4.191,61.595 7.366,61.595 8.763,62.992 8.763,64.389 11.136,66.762 11.136,82.142 14.097,85.103 16.904,85.103 18.796,86.995 18.796,115.062 19.477,115.743 19.477,117.521 v1(19.939,117.983)
  Bottom Layer w0.254: v1(19.939,117.983) 20.447,117.475 29.845,117.475 31.127,116.193 U1.39
LCD_EN: U1.2 X2.6 | length 58.2
  Top Layer w0.254: v1(21.209,93.472) 21.336,93.599 v1(36.195,93.599)
  Bottom Layer w0.254: X2.6 2.54,74.295 2.591,74.346 2.591,76.144 3.281,76.835 20.955,76.835 21.209,77.089 v1(21.209,93.472) ; U1.2 35.128,94.158 35.687,93.599 v1(36.195,93.599)
LCD_RS: U1.40 X2.4 | length 77.6
  Top Layer w0.254: v1(12.065,74.93) 11.944,75.051 11.944,82.232 14.007,84.295 17.239,84.295 19.304,86.36 19.304,114.808 21.082,116.586 v1(21.082,118.491)
  Bottom Layer w0.254: X2.4 4.775,74.6 6.675,74.6 7.006,74.93 v1(12.065,74.93) ; v1(21.082,118.491) 21.463,118.11 30.226,118.11 31.627,116.709 U1.40
LCD_RW: U1.53 X2.5 | length 99.4
  Top Layer w0.254: v1(12.192,73.66) 12.746,74.214 12.746,75.519 12.573,75.692 12.573,82.142 14.097,83.666 17.499,83.666 20.447,86.614 20.447,97.917 21.382,98.852 21.382,100.231 20.955,100.658 20.955,114.215 22.779,116.039 22.779,117.692 23.922,118.835 23.922,120.061 v1(24.257,120.396)
  Bottom Layer w0.254: X2.5 6.731,73.66 v1(12.192,73.66) ; v1(24.257,120.396) 24.638,120.015 41.603,120.015 43.861,117.757 43.861,117.193 43.688,117.02 43.688,106.299 42.012,104.623 U1.53
LED_C1: R45.1 U1.45 | length 93.7
  Top Layer w0.254: v1(36.068,116.205) 36.449,116.586 v1(36.449,122.301)
  Bottom Layer w0.254: U1.45 34.138,115.926 34.417,116.205 v1(36.068,116.205) ; v1(36.449,122.301) 36.322,122.301 37.084,121.539 42.234,121.539 45.385,118.388 45.385,104.997 48.273,102.108 48.273,95.854 45.71,93.29 45.71,86.888 44.577,85.755 44.577,55.819 45.974,54.422
LED_C2: R46.1 U1.44 | length 95.1
  Top Layer w0.254: v1(35.433,122.047) 35.687,121.793 v1(35.687,117.221)
  Bottom Layer w0.254: U1.44 33.63,116.18 34.29,116.84 35.306,116.84 v1(35.687,117.221) ; v1(35.433,122.047) 35.433,122.248 36.167,122.982 36.731,122.982 37.13,122.583 37.13,122.509 37.592,122.047 42.445,122.047 45.893,118.599 45.893,105.207 48.781,102.318 48.781,95.528 46.218,92.964 46.218,86.604 45.085,85.471 45.085,56.029 46.482,54.632
NetBATERY1_P$2: BATERY1.P$2 U1.1 | length 33.5
  Top Layer w0.254: v1(31.877,88.392) 31.877,88.519 32.766,88.519 v1(37.211,92.964)
  Bottom Layer w0.254: v1(31.877,88.392) 31.877,70.358 32.893,69.342 BATERY1.P$2 ; U1.1 35.636,95.047 36.403,94.28 36.477,94.28 37.084,93.673 37.084,92.964 v1(37.211,92.964)
NetBR1_AC1: BR1.AC1 CON_LIN_IN1.1
NetBR1_AC2: BR1.AC2 CON_LIN_IN1.2
NetC3_+: C3.+ CON_LIN_OUT1.1 R1.2 R2.2 R4.2 R11.2 R12.2 TP3.TP | length 27.5
  Bottom Layer w1.6: CON_LIN_OUT1.1 6.649,13.36 R2.2 13.843,16.18 R1.2
  Bottom Layer w1.905: R2.2 18.39,13.36 19.558,12.192 C3.+
NetC4_1: C4.1 R13.1
NetC5_1: C5.1 R24.1
NetC5_2: C5.2 R22.1 R26.2 U$2.6 U$2.12
NetC6_1: C6.1 U$3.1
NetC9_2: C9.2 Q1.2 U1.3 | length 13.8
  Bottom Layer w0.254: U1.3 34.646,93.751 36.322,92.075 38.056,92.075 38.691,91.44 Q1.2 42.926,92.583 C9.2
NetC10_2: C10.2 Q1.1 U1.4 | length 15.7
  Bottom Layer w0.254: U1.4 34.138,93.37 35.941,91.567 37.846,91.567 40.513,88.9 Q1.1 43.18,87.503 C10.2
NetC12_1: C12.1 Q2.P$1 R31.2 U1.6 | length 19.5
  Bottom Layer w0.254: U1.6 33.147,92.329 34.163,91.313 34.163,87.757 ; C12.1 32.766,84.186 32.766,86.03 Q2.P$1 34.036,87.3 34.036,87.63 35.877,87.63 37.528,85.979 R31.2
NetC13_1: C13.1 Q2.P$3 R31.1 U1.5 | length 14.6
  Bottom Layer w0.254: U1.5 33.63,92.989 35.281,91.338 Q2.P$3 ; Q2.P$3@35.346,90.185 C13.1 38.339,90.185 38.87,89.654 38.87,88.138 R31.1
NetC14_1: C14.1 R40.2 U$4.PAD1 U$4.PAD2 U$4.PAD3 U$4.PAD4 U$4.PAD5 U$4.PAD6 | length 19.1
  Bottom Layer w0.254: U$4.PAD1 7.049,124.255 U$4.PAD3 U$4.PAD4 U$4.PAD5 U$4.PAD6 14.301,125.144 14.301,123.483 17.323,123.483 R40.2
NetC100_1: C100.1 U1.30 | length 5.2
  Bottom Layer w0.254: C100.1@21.905,108.077 23.302,106.68 24.257,106.68 25.298,105.639 U1.30
NetD1_1: D1.1 R23.2 TP15.TP
NetD1_2: D1.2 R16.2 TP11.TP
NetD1_3: D1.3 JP2.2 T3.B TP_T1.TP
NetD2_1: D2.1 R45.2
NetD3_1: D3.1 R46.2
NetD4_1: D4.1 R47.2
NetJP1_2: JP1.2 R19.1 TP13.TP
NetJP2_3: JP2.3 R25.1
NetJP3_2: JP3.2 R28.1 TP18.TP | length 0.4
  Top Layer w0.254: JP3.2@5.334,45.593 JP3.2@5.588,45.339
NetL1_1: L1.1 U$4.V | length 6.3
  Bottom Layer w0.254: L1.1 8.732,119.984 9.749,121.001 U$4.V
NetR1_1: R1.1 R3.2 T1.P$3 T2.P$3 TP1.TP TP2.TP | length 62.1
  Bottom Layer w1.6: R1.1 33.401,19.304 ; T2.P$3 36.779,15.926 33.401,19.304 ; T1.P$3@48.844,2.311 48.844,18.212 47.752,19.304 33.401,19.304
NetR3_1: R3.1 R5.1 TP6.TP U$2.3
NetR4_1: R4.1 R10.2 TP5.TP U$2.2
NetR6_1: R6.1 R14.2 R15.2 T1.P$1 T2.P$1 TP7.TP
NetR7_1: R7.1 R8.1 R17.2 R18.2 TP9.TP U$1.3
NetR9_2: R9.2 R13.2 R16.1 U$1.8
NetR10_1: R10.1 R26.1 TP14.TP U$2.1
NetR14_1: R14.1 R15.1 T3.E TP12.TP
NetR19_2: R19.2 U$1.10
NetR22_2: R22.2 R24.2 R27.1 TP16.TP U$2.7
NetR23_1: R23.1 T4.C
NetR25_2: R25.2 R29.2 U$1.14
NetR27_2: R27.2 T4.B U$2.10
NetR28_2: R28.2 U$2.5
NetR29_1: R29.1 R30.1 U$1.13
NetR32_1: R32.1 U$4.D- | length 6.1
  Bottom Layer w0.254: U$4.D- 10.409,117.287 R32.1
NetR34_1: R34.1 U$4.D+ | length 6.8
  Bottom Layer w0.254: U$4.D+ 11.049,120.142 12.89,118.301 R34.1
NetR37_2: R37.2 U1.60 | length 9.5
  Bottom Layer w0.254: U1.60 39.777,101.12 44.123,96.774 R37.2@45.317,96.774
NetR39_2: R39.2 X1.11 | length 6.4
  Bottom Layer w0.254: X1.11 7.62,99.441 9.601,97.46 R39.2
NetR43_2: R43.2 X1.17 | length 9.6
  Bottom Layer w0.254: X1.17 8.509,91.821 9.017,92.329 9.398,92.329 10.414,93.345 13.589,93.345 13.716,93.218 R43.2 R43.2@13.76,92.002
NetR44_2: R44.2 X1.19 | length 7.6
  Bottom Layer w0.254: X1.19 8.89,89.281 9.525,89.916 9.525,91.44 10.043,91.958 R44.2
NetR47_1: R47.1 U$2.8 U$2.9
Push1: SV5.4 U1.25 | length 4
  Bottom Layer w0.254: 22.098,103.124 U1.25
Push2: SV6.4 U1.26 | length 3.4
  Bottom Layer w0.254: 22.86,103.886 23.876,103.886 24.13,103.632 U1.26
RESET: C17.1 R42.2 S1.3 S1.4 U1.7 X1.15 | length 92.7
  Top Layer w0.254: S1.3 7.214,60.3 9.525,62.611 9.525,64.262 12.446,67.183 v1(12.446,72.136) ; v1(21.971,92.583) 21.844,92.583 22.606,91.821 v1(31.75,91.821)
  Bottom Layer w0.254: X1.15 21.717,94.361 21.971,94.107 v1(21.971,92.583) 21.89,92.502 21.89,77.052 21.165,76.327 13.716,76.327 13.716,73.66 12.446,72.39 v1(12.446,72.136) ; S1.4 7.671,50.927 C17.1 11.034,55.311 R42.2 10.846,55.829 9.703,56.972 S1.3 ; v1(31.75,91.821) 32.639,92.71 U1.7
SPI_MISO: SV4.3 U1.52 | length 25.6
  Top Layer w0.254: v1(43.18,117.475) 43.18,121.412 43.307,121.539 45.974,121.539 SV4.3
  Bottom Layer w0.254: U1.52 41.631,105.131 43.053,106.553 43.053,117.475 v1(43.18,117.475)
SPI_MOSI: SV4.2 U1.27 | length 52.8
  Top Layer w0.254: v1(22.352,104.775) 21.971,105.156 21.971,110.236 23.114,111.379 23.114,114.09 24.576,115.551 24.576,117.283 27.351,120.059 27.351,121.694 26.543,122.502 v1(26.543,123.063)
  Bottom Layer w0.254: v1(22.352,104.775) 22.555,104.572 23.909,104.572 24.34,104.14 U1.27 ; v1(26.543,123.063) 27.261,123.063 28.201,122.123 29.203,122.123 30.175,123.096 30.175,123.691 30.741,124.257 41.672,124.257 44.186,121.742 45.205,121.742 46.177,122.715 46.177,123.31 46.743,123.876 48.311,123.876 SV4.2
SPI_SCK: SV4.5 U1.51 | length 24.6
  Top Layer w0.254: v1(41.656,118.491) 41.656,122.428 42.037,122.809 SV4.5
  Bottom Layer w0.254: U1.51 41.25,105.639 42.418,106.807 42.418,117.983 41.91,118.491 v1(41.656,118.491)
TIM2_CH3: SV5.2 U1.28 | length 4.4
  Bottom Layer w0.254: 22.733,106.172 22.733,105.537 23.114,105.156 24.257,105.156 24.79,104.623 U1.28
TIM2_CH4: SV5.3 U1.29 | length 2.7
  Bottom Layer w0.254: 23.749,105.918 24.003,105.664 24.467,105.664 25.001,105.131 U1.29
TIM3_CH1: SV6.3 U1.22 | length 3.1
  Bottom Layer w0.254: 23.114,101.473 23.261,101.62 U1.22
TIM3_CH2: SV6.2 U1.23 | length 4.1
  Bottom Layer w0.254: 22.098,101.981 22.237,102.12 U1.23
USART_RX: SV3.3 U1.43 | length 17.6
  Top Layer w0.254: SV3.3 31.2,123.148 31.2,118.279 v1(31.369,118.11)
  Bottom Layer w0.254: v1(31.369,118.11) 31.623,118.364 33.475,118.364 33.955,117.884 33.955,117.267 33.147,116.459 U1.43
USART_TX: SV3.2 U1.42 | length 17.6
  Top Layer w0.254: 32.715,121.742 32.715,124.282 SV3.2@33.782,125.349 ; 32.766,121.691 33.274,121.183 v1(33.274,117.602)
  Bottom Layer w0.254: U1.42 32.639,116.893 33.274,117.528 v1(33.274,117.602)
USB_OTG_HS_DM: R32.2 U1.35 | length 25.4
  Bottom Layer w0.254: R32.2 11.989,113.792 14.859,113.792 15.748,114.681 28.829,114.681 29.127,114.383 U1.35
USB_OTG_HS_DP: R34.2 U1.36 | length 23
  Bottom Layer w0.254: R34.2 29.007,115.265 29.627,114.645 U1.36
USB_OTG_HS_ID: U1.33 U$4.ID | length 44.5
  Top Layer w0.254: v1(4.953,119.761) 5.08,119.888 v1(13.335,119.888)
  Bottom Layer w0.254: v1(4.953,119.761) 4.953,117.475 9.652,112.776 15.28,112.776 16.042,113.538 27.178,113.538 28.127,112.589 U1.33 ; U$4.ID 11.709,121.514 v1(13.335,119.888)
USB_OTG_HS_VBUS: L1.2 U1.34 | length 31.6
  Bottom Layer w0.254: L1.2 6.096,117.475 10.287,113.284 15.069,113.284 15.958,114.173 27.94,114.173 28.627,113.486 U1.34
V+: BR1.+ C1.+ C2.+ R6.2 R7.2 R8.2 T1.P$2 T2.P$2 TP_VLIN1.TP U$1.4 U$2.4 | length 84.3
  Top Layer w1.905: T2.P$2 39.268,4.851 40.894,6.477 49.911,6.477 51.333,5.055 T1.P$2
  Bottom Layer w1.905: T1.P$2 51.333,6.248 52.07,6.985 87.884,6.985 90.551,9.652 90.551,26.251 C2.+
VDAC: JP1.3 | length 72.3
  Bottom Layer w0.254: 7.874,45.593 12.827,45.593 12.827,50.058 13.802,51.033 13.802,64.729 16.429,67.356 23.83,67.356 ; 23.922,67.264 23.922,94.036 22.733,95.225 22.733,99.695 23.114,100.076 24.003,100.076 24.547,100.62 26.127,100.62
VIN: TP8.TP U1.16 U$1.1 U$1.2 | length 66.6
  Top Layer w0.254: v1(24.938,68.245) 24.938,68.153 25.019,68.072 33.613,68.072 34.248,67.437 35.195,67.437 35.241,67.483 37.528,67.483 38.1,66.911 v1(38.1,66.802) ; v1(42.672,56.007) 43.18,56.007 44.577,54.61 v1(49.149,54.61)
  Bottom Layer w0.254: v1@24.765,68.245 24.765,99.06 24.825,99.12 26.127,99.12 ; v1(38.1,66.802) 38.1,66.631 43.18,61.551 43.18,56.007 v1(42.672,56.007)
VMEAS: TP4.TP U1.14 U$1.6 U$1.7 | length 58.4
  Top Layer w0.254: v3(20.066,46.482) 20.701,45.847 v3(22.987,45.847)
  Bottom Layer w0.254: v3(20.066,46.482) 20.066,59.69 21.082,60.706 22.479,60.706 26.738,64.965 26.738,75.37 28.194,76.826 28.194,93.472 29.127,94.405 U1.14
VPOT: JP1.1 SV1.2
VREF: C7.1 SV1.1 SV2.1 TP17.TP U$3.4 U$3.5
pads on no net: JP2.1 SV5.6 SV6.6 U1.17 U1.20 U1.21 U1.41 U1.54 U1.57 U1.58 U1.59 U1.61 U1.62
copper on no net: | length 151.8
  Top Layer w0.254: v1(26.67,77.851) 32.512,77.851 32.639,77.724 v1(32.766,77.724) ; v1(31.881,121.789) 32.258,121.412 v1(32.258,117.475) ; v1(43.053,93.726) 43.099,93.68 48.941,93.68
  Bottom Layer w0.254: 8.179,22.352 8.306,22.479 ; v1(26.67,77.851) 26.797,77.978 26.797,93.726 28.127,95.056 28.127,97.12 ; v1(31.881,121.789) 33.948,121.789 35.65,123.49 41.72,123.49 46.401,118.809 46.401,105.417 49.289,102.529 ; 32.131,108.636 32.131,117.348 v1(32.258,117.475) ; v1(32.766,77.724) 43.688,66.802 43.688,52.959 v1(43.942,52.705) ; v5@35.179,104.14 37.643,104.14 ; 37.643,100.12 38.945,100.12 42.926,96.139 42.926,93.853 v1(43.053,93.726) ; 37.643,100.62 39.515,100.62 43.688,96.447 ; 37.643,101.62 40.166,101.62 42.853,98.933 45.317,98.933 ; 37.643,102.12 39.739,102.12 39.751,102.108 40.567,102.108 41.71,100.965 45.19,100.965 ; 37.643,102.62 42.668,102.62 43.053,102.235
  other v5: 35.052,104.013

## Keep-outs
Keep-Out Layer:
  lines w0.254: 153.67,0.127 153.67,56.388 153.732,56.326 59.206,56.326 59.087,56.445 59.087,126.808 59.086,126.809 59.086,127.322 59.026,127.382 0.338,127.382 0.381,127.338 0.381,0.127 0.508,0.254 153.797,0.254

## Text inside footprints (layer, text, board x,y; h text height)
JP1: Bottom Overlay "3" at 63.246,43.434 h1.54; Bottom Overlay "2" at 65.786,43.434 h1.54; Bottom Overlay "1" at 68.326,43.434 h1.54
JP2: Bottom Overlay "3" at 42.762,26.703 h1.54 r180; Bottom Overlay "2" at 40.222,26.703 h1.54 r180; Bottom Overlay "1" at 37.682,26.703 h1.54 r180
JP3: Bottom Overlay "3" at 7.62,48.26 h1.54 r180; Bottom Overlay "2" at 5.08,48.26 h1.54 r180; Bottom Overlay "1" at 2.54,48.26 h1.54 r180
S1: Mechanical 16 "4" at 7.747,50.165 h1.97 r90; Mechanical 16 "3" at 7.747,58.293 h1.97 r90; Mechanical 16 "2" at 3.429,50.165 h1.97 r90; Mechanical 16 "1" at 3.302,58.039 h1.97 r90
SV1: Bottom Overlay "1" at 60.96,52.324 h1.97 r180
SV2: Bottom Overlay "1" at 71.882,52.197 h1.97 r180
SV3: Bottom Overlay "6" at 31.623,120.396 h1.97; Bottom Overlay "2" at 36.322,125.095 h1.97; Bottom Overlay "1" at 36.322,122.555 h1.97
SV4: Bottom Overlay "6" at 47.625,120.015 h1.97; Bottom Overlay "2" at 52.324,124.714 h1.97; Bottom Overlay "1" at 52.324,122.174 h1.97
SV5: Bottom Overlay "6" at 9.017,35.306 h1.97 r90; Bottom Overlay "2" at 4.318,40.005 h1.97 r90; Bottom Overlay "1" at 6.858,40.005 h1.97 r90
SV6: Bottom Overlay "6" at 18.669,35.306 h1.97 r90; Bottom Overlay "2" at 13.97,40.005 h1.97 r90; Bottom Overlay "1" at 16.51,40.005 h1.97 r90
TP6: Mechanical 25 ">TP_SIGNAL_NAME" at 43.828,40.259 h1.57 r90
TP_T1: Mechanical 25 ">TP_SIGNAL_NAME" at 48.299,30.456 h1.57 r90
TP_VLIN1: Mechanical 25 ">TP_SIGNAL_NAME" at 82.143,24.334 h1.57 r90
U$4: Bottom Overlay "V" at 9.779,122.428 h0.39 r90; Bottom Overlay "D-" at 10.541,122.428 h0.39 r90; Bottom Overlay "D+" at 11.176,122.428 h0.39 r90; Bottom Overlay "ID" at 11.811,122.428 h0.39 r90; Bottom Overlay "GND" at 12.446,122.428 h0.39 r90